# Altium PCB PCB1.PcbDoc (part 3 of 3)
Units mil, origin at the board's own origin, x right, y up, seen from the top; angles counter-clockwise.
Board outline 2830 x 1100 mil, 4 copper layers (L1, L2, L3, L4), stack 61.583 mil thick; 64 components, 73 nets, 315 pads, 162 vias.
Unrouted connection lines stored in the file: 1.
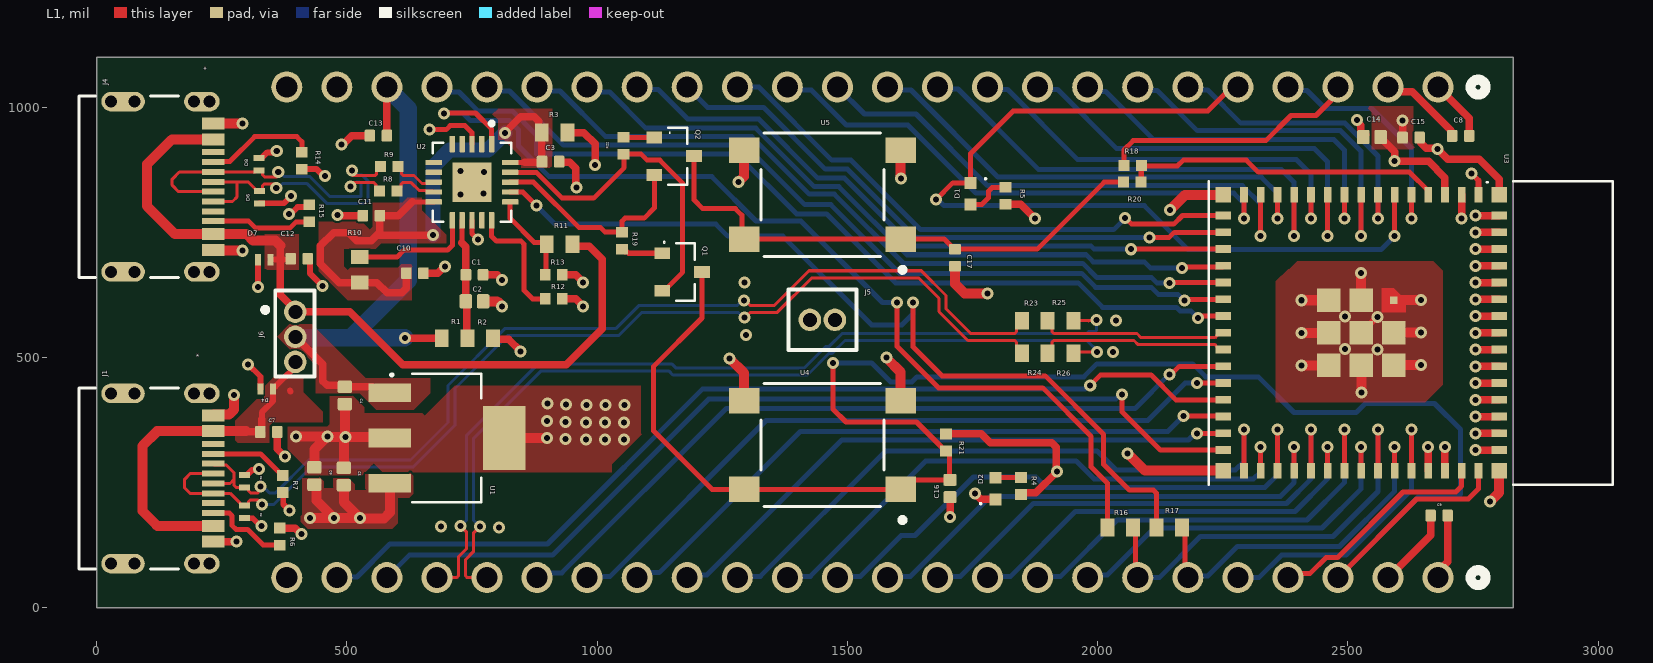
[diagram p0: L1 view]

## Via types
v1: diameter 24, hole 12, L1 to L4, tented both sides, 162 vias

## Nets (pads, with @x,y where several pads share a name; then routed paths per layer and width w, separated by ;. In a path a pad name is that pad's centre, name@x,y a point inside that pad or via, vN(x,y) a via of type N, cw(c..) or ccw(c..) an arc to the next point about the centre after c; other vN are vias at no path point) (continued)
GPIO8: (continued)
  L4 w10: J2.11 1684,1036 1721,1036 1882,875 2367,875 2392.14,849.86 v1(2392.14,742)
GPIO9: J2.12 U3.13 | length 965.2
  L1 w10: v1(2359.09,777.2) U3.13
  L4 w10: J2.12 1586.03,1033.97 1627.03,1033.97 1801,860 2327,860 2359.09,827.91 v1(2359.09,777.2)
GPIO10: J2.13 U3.14 | length 1088.9
  L1 w10: v1@2325.62,742.41 U3.14
  L4 w10: J2.13 1534,986 1637,986 1780,843 2289,843 2325.21,806.79 v1(2325.21,742)
GPIO11: J2.14 U3.15 | length 1086.5
  L1 w10: v1(2292.16,777.2) U3.15
  L4 w10: J2.14 1386,1034 1428,1034 1498,964 1621,964 1757,828 2272,828 2292.16,807.84 v1(2292.16,777.2)
GPIO12: J2.15 U3.16 | length 1110.6
  L1 w10: v1(2055,778) 2055.86,778 2067.86,766 2151.84,766 2169.23,783.39 U3.16
  L4 w10: J2.15 1323,1040 1469,894 1507,894 1646,755 2032,755 v1(2055,778)
GPIO13: J2.16 U3.17 | length 1200
  L1 w10: v1(2103,739) 2142,739 2152.93,749.93 U3.17
  L4 w10: J2.16 1220.43,999.57 1332.43,999.57 1456,876 1500,876 1637,739 v1(2103,739)
GPIO14: J2.17 U3.18 | length 1305.2
  L1 w10: v1(2067,716) 2067.23,716.23 2250.59,716.23 U3.18
  L4 w10: J2.17 1085,1035 1122,1035 1181,976 1323,976 1441,858 1494,858 1630,722 1987,722 1993,716 v1(2067,716)
GPIO15: J2.18 U3.19 | length 1422
  L1 w10: v1(2168,679) 2170,681 2248.82,681 U3.19
  L4 w10: J2.18 989.95,1030.05 1024.95,1030.05 1097,958 1317,958 1434,841 1483,841 1619,705 1977,705 1991,691 2093,691 2105,679 v1(2168,679)
GPIO16: J2.19 U3.20 | length 1533
  L1 w10: v1(2143,649) 2143.27,649.27 2250.55,649.27 U3.20
  L4 w10: J2.19 888,1032 926,1032 1017,941 1309,941 1424,826 1474,826 1612,688 1970,688 1998.75,659.25 2107.75,659.25 2118,649 v1(2143,649)
GPIO17: J2.20 U3.21 | length 1648.1
  L1 w10: v1(2173,614) 2175.07,616.07 U3.21
  L4 w10: J2.20 788,1032 825,1032 933,924 1296,924 1415,805 1467,805 1604,668 1968,668 1996,640 2107.2,640 2121.2,626 2160.14,626 2172.14,614 v1(2173,614)
GPIO18: J2.21 U3.22 | length 1785.3
  L1 w10: v1(2200,579) 2203.79,579 2207.39,582.61 U3.22
  L4 w10: J2.21 689.95,1030.05 724.02,1030.05 761.54,992.54 830.16,992.54 879,943.7 879,906 1279,906 1398.5,786.5 1458.5,786.5 1596,649 1961,649 2010,600 2157.3,600 2164.3,593 2186,593 v1(2200,579)
GPIO21: J3.19 U3.25 | length 1545.7
  L1 w10: v1(2143,466) 2146.79,466 2163,482.21 U3.25
  L4 w10: J3.19 889.53,69.53 929.53,69.53 1258,398 2075,398 v1(2143,466)
GPIO26: J3.18 U3.26 | length 1431.8
  L1 w10: v1(2198.35,448.75) U3.26
  L4 w10: J3.18 982.57,62.57 1026,62.57 1337.43,374 2100,374 2174.75,448.75 v1(2198.35,448.75)
GPIO33: J3.17 U3.28 | length 1305.1
  L1 w10: v1(2171,383) 2171.59,382.41 2250.23,382.41 U3.28
  L4 w10: J3.17 1089.95,69.95 1124.02,69.95 1406.07,352 2140,352 v1(2171,383)
GPIO34: J3.16 U3.29 | length 1190.8
  L1 w10: v1@2198,348 v1(2198.35,348.35) U3.29
  L4 w10: J3.16 1185.53,65.53 1219.53,65.53 1489,335 2181.21,335 2194.57,348.35 v1(2198.35,348.35)
GPIO35: J3.15 U3.31 | length 1286.4
  L1 w10: U3.31 v1@2292.16,355.87
  L4 w10: J3.15 1282.57,62.57 1326,62.57 1576.43,313 1999,313 2037,275 2275,275 2292.57,292.57 v1(2292.57,356.28)
GPIO36: J3.14 U3.32 | length 1160.1
  L1 w10: U3.32 v1(2325.62,321.09)
  L4 w10: J3.14 1382.57,62.57 1426,62.57 1656.43,293 1957,293 1993,257 2311,257 2325.62,271.62 v1(2325.62,321.09)
GPIO37: J3.13 U3.33 | length 1155.1
  L1 w10: U3.33 v1@2359.09,355.87
  L4 w10: J3.13 1482.57,62.57 1526,62.57 1607.43,144 1635,144 1752,261 1876.3,261 1897.3,240 2334,240 2359.5,265.5 v1(2359.5,356.28)
GPIO38: J3.12 U3.34 | length 1010
  L1 w10: U3.34 v1(2392.55,321.09)
  L4 w10: J3.12 1582.57,62.57 1626,62.57 1785.43,222 2364.69,222 2392.55,249.86 v1(2392.55,321.09)
GPIO39: J3.11 U3.35 | length 1009.4
  L1 w10: U3.35 v1@2426.02,355.87
  L4 w10: J3.11 1682.57,62.57 1726,62.57 1871.43,208 2377,208 2426.43,257.43 v1(2426.43,356.28)
GPIO40: J3.10 U3.36 | length 872.4
  L1 w10: U3.36 v1(2459.48,321.09)
  L4 w10: J3.10 1782.57,62.57 1826,62.57 1955.43,192 2394,192 2459.48,257.48 v1(2459.48,321.09)
GPIO41: J3.9 U3.37 | length 880.5
  L1 w10: U3.37 v1@2492.94,355.87
  L4 w10: J3.9 1882.57,62.57 1926,62.57 2038.43,175 2418,175 2493.35,250.35 v1(2493.35,356.28)
GPIO42: J3.8 U3.38 | length 751.1
  L1 w10: U3.38 v1(2526.41,321.09)
  L4 w10: J3.8 1985.53,65.53 2019.53,65.53 2113,159 2448,159 2526.41,237.41 v1(2526.41,321.09)
GPIO45: J3.5 U3.41 | length 622.6
  L1 w10: U3.41 v1@2626.8,355.87
  L4 w10: J3.5 2322,60 2367,105 2496,105 2627.21,236.21 2627.21,268.94 v1(2627.21,356.28)
GPIO46: J3.4 U3.44 | length 453.6
  L1 w10: J3.4 2388.53,68.53 2424.53,68.53 2456,100 2479,100 2610,231 2715.34,231 2727.2,242.86 U3.44
GPIO47: J3.23 U3.27 | length 1959.2
  L1 w10: v1(1985.11,444.11) 2006,465 2106.33,465 2156.04,415.28 U3.27
  L4 w10: J3.23 481.14,61.14 520.14,61.14 586,127 901,127 1211,437 1974.21,437 1981.32,444.11 v1(1985.11,444.11)
GPIO48: J3.22 U3.30 | length 1888.9
  L1 w10: v1(2049,426) 2049,391 2125.11,314.89 U3.30
  L4 w10: J3.22 625,105 911,105 1223,417 2036.21,417 2045.21,426 v1(2049,426)
NetD1_2: D1.2 R5.1 | length 92.2
  L1 w10: D1.2 1768.65,805.35 1782,818.69 1782,832.14 1789.19,839.33 1815.4,839.33 R5.1
NetD2_2: D2.2 R4.1 | length 51.1
  L1 w10: D2.2 1796.14,259.79 1846.86,259.79 R4.1
NetJ1_A5: J1.A5 R7.2 | length 156.8
  L1 w10: J1.A5 327.61,307.21 370.82,264.01 R7.2
NetJ1_B5: J1.B5 R6.2 | length 170.9
  L1 w10: J1.B5 265.14,189.1 271,183.24 271,163.86 278.86,156 302,156 333.01,124.99 R6.2
NetJ4_A5: J4.A5 R14.2 | length 223.1
  L1 w10: J4.A5 234.12,891.13 266.13,891.13 316,941 400,941 410,931 R14.2
NetJ4_B5: J4.B5 R15.2 | length 203.1
  L1 w10: J4.B5 303.98,772.02 318,758 386,758 398.19,770.19 424.2,770.19 R15.2
NetQ1_1: Q1.1 R19.2 | length 83.3
  L1 w10: R19.2 1055.63,710.36 1060.31,710.36 1062.67,708 Q1.1
NetQ2_1: Q2.1 R22.2 | length 61.5
  L1 w10: R22.2 1053.3,939.7 1113.93,939.7 Q2.1
NetR10_2: R10.2 U2.11 | length 244.4
  L1 w10: R10.2 600.59,700.59 614,714 701,714 710.63,723.63 U2.11
NetR12_2: R12.2 U2.15 | length 244.7
  L1 w10: U2.15 789.37,741.63 799,732 848.14,732 854,726.14 854,634 871,617 R12.2
RTS_FTDI: Q1.2 R22.1 U2.19 | length 676.9
  L1 w10: U2.19 878.63,869.68 930.32,818 993,818 1054,879 1054,904.99 R22.1 ; R22.1@1054.18,905.99 1088.01,905.99 1100,894 1125.12,894 1171,848.12 1171,670.26 1133.94,633.2 Q1.2
RXD_FTDI: R16.2 U2.1 | length 1965.6
  L1 w10: v1(694,987) 695,988 757.14,988 789.37,955.77 U2.1 ; v1(1599,609.53) 1599,522 1682,439 1890,439 1987,342 1987,281 2019.41,248.59 R16.2
  L4 w10: v1(694,987) 695,988 732,988 747,973 825,973 843,955 843,922.2 904.2,861 1229,861 1317.5,772.5 1407,772.5 1569.97,609.53 v1(1599,609.53)
TXD_FTDI: R17.2 U2.17 | length 1745.7
  L1 w10: U2.17 851.68,830.32 v1(879,803) ; v1(1631,609.28) 1631,521 1689,463 1895,463 2012,346 2012,286 2063.4,234.6 2111.55,234.6 2117.41,228.74 R17.2
  L4 w10: v1(879,803) 916,766 1237,766 1261,742 1371,742 1548,565 1609,565 1631,587 v1(1631,609.28)
U0RXD: J3.6 R17.1 U3.40 | length 731.1
  L1 w10: R17.1 2174.3,154.3 2174.3,65.7 J3.6 ; U3.40 v1(2593.34,321.09)
  L4 w10: J3.6 2186.43,53.57 2196.01,63.14 2220.14,63.14 2279,122 2483,122 2593.34,232.34 v1(2593.34,321.09)
U0TXD: J3.7 R16.1 U3.39 | length 861.9
  L1 w10: R16.1 2075.3,155.3 2075.3,64.7 J3.7 ; U3.39 v1@2559.87,355.87
  L4 w10: J3.7 2123,60 2205,142 2470,142 2560,232 2560,261 2560.28,261.28 v1(2560.28,356.28)
VBUS_SENSE: R11.1 R13.2 U2.16 | length 192.1
  L1 w10: U2.16 826.18,777.82 874.06,729.94 R11.1@899.41,729.94 ; R13.2 897.83,666.57 897.83,724.43 R11.1
  L1 w15: R11.1 R11.1@899.41,729.94
pads on no net: J1. J1.13 J1.14 J1.15 J1.16 J1.A8 J1.B8 J2.24 J4. J4.13 J4.14 J4.15 J4.16 J4.A8 J4.B8 U2.2 U2.4 U2.5 U2.6 U2.7 U2.14

## Polygon pours and split planes (outlines as drawn)
GND on L1 "GND_L01_P014" (solid, remove dead copper, pour order 14): 417,265 531,265 554,288 571,271 1029,271 1029,286 1089,346 1087,348 1087,443 716,443 656,383 651,388 535,388 535,400 512,423 511,422 466,422 466,366 461,361 382,361 382,316 417,281 416,280 416,266
+3V3_REGULATOR on L1 "+3V3_REGULATOR_L01_P013" (solid, remove dead copper, pour order 13): 408,172 422,158 591,158 602,169 602,220 625,220 633,228 633,264 627,270 624,267 537,267 537,238 540,235 516,235 516,247 504,259 473,259 473,241 475,239 454,239 454,253 446,261 444,259 411,259 411,186 408,183
GND on L1 "GND_L01_P010" (solid, remove dead copper, pour order 10): 2383,676 2399,692 2670,692 2689,673 2689,445 2654,410 2356,410 2356,652 2382,678
+5V_VBUS_2 on L1 "+5V_VBUS_2_L01_P009" (solid, remove dead copper, pour order 9): 277,373 320,416 335,416 335,441 355,461 413,461 413,430 452,391 452,370 352,370 345,363 345,329 282,329 277,334
+5V_VBUS_1 on L1 "+5V_VBUS_1_L01_P007" (solid, remove dead copper, pour order 7): 345,674 344,675 336,675 336,746 404,746 404,675 345,675
+5V on L1 "+5V_L01_P005" (solid, remove dead copper, pour order 5): 559,395 634,395 667,428 667,458 538,458 430,566 385,566 360.5,541.5 386,516 406,516 437.5,484.5 437.5,428 526,428
+3V3_FTDI on L1 "+3V3_FTDI_L01_P002" (solid, remove dead copper, pour order 2): 635,686 630,681 630,614 502,614 444,672 444,771 530,771 546,755 552,761 552,809 611,809 621,819 650,819 650,794 699,745 699,728 569,728 558,717 494,717 494,682 502,674 507,679 602,679 609,686
+3V3_FTDI on L1 "+3V3_FTDI_L01_P001" (solid, remove dead copper, pour order 1): 839,909 848,900 848,879 907,879 910,882 910,997 802,997 791,986 802,975 802,935 813,935
+3V3 on L1 "+3V3_L01_P000" (solid, remove dead copper, pour order 0): 2548,916 2629,916 2633,920 2630,923 2630,1002 2539,1002 2537,1000 2547,990 2547,914
GND on L2 "GND_L02_P019" (solid, remove dead copper, pour order 19): 2811,27 2802,36 2802,1077 27,1077 20,1077 20,203 0,183 10,173 10,18 20,8
+3V3_REGULATOR on L2 "+3V3_REGULATOR_L02_P016" (solid, remove dead copper, pour order 16): 433,151 434,152 641,152 641,260 396,260 396,171.5 411.64,159.77 433,156
+3V3 on L2 "+3V3_L02_P015" (solid, remove dead copper, pour order 15): 1426,771 1445,790 1445,1095 2603,1095 2650,1048 2650,859 2328,859 2261,792 2261,310 2279,310 2304,285 2576,285 2576,222 2751,47 2738,34 1427,34 1427,393 1482,448 1452,478 1452,780 1438,794
GND on L3 (split plane): 2809.9,20.1 20.1,20.1 20.1,1079.9 2809.9,1079.9

## Silkscreen, mask and mechanical layers (free items; w line width, h text height)
Bottom Overlay:
  text "ESP32" at 1726,528 h60
  text "TRIAL BOARD" at 651,524 h60
  text "Mustafa Sherif / 27/9/2026 / ON EARTH" at 2791,419 h60
Top Solder:
  lines w50: 1425,575 1475,575
Board Shape:
  lines w20: 0.64,1085.73 0.64,-4.48 2809.5,-4.48 2823.39,9.4 2823.39,1089.2 7.59,1089.2

## Text inside footprints (layer, text, board x,y; h text height)
J1: Top Overlay "*" at 195,507 h10 r270
J4: Top Overlay "*" at 210.48,1080.84 h10 r270
J5: Mechanical 40 "2.159" at 1129.02,570 h10; Mechanical 40 "1.270" at 1299.02,650 h10; Mechanical 40 "2.540" at 1424.02,310 h10